# Altium PCB PA_Channel_SUP_CTRL.PcbDoc (part 1 of 2)
Units mm, origin at the board's own origin, x right, y up, seen from the top; angles counter-clockwise.
Board outline 189.6 x 31.35 mm, 2 copper layers (Top Layer, Bottom Layer), stack 1.571 mm thick; 72 components, 44 nets, 242 pads, 317 vias.
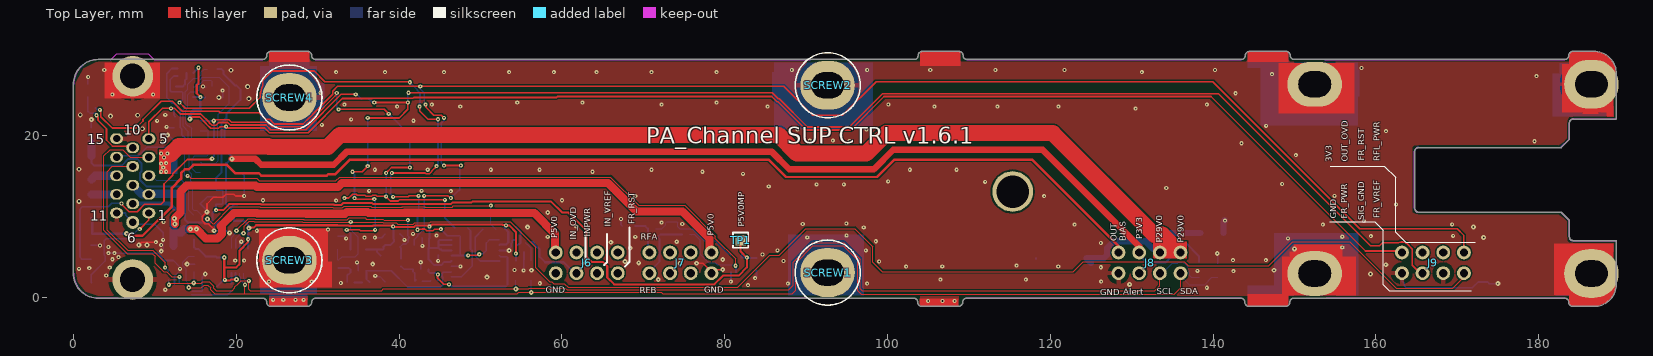
[diagram p0: Top Layer view]
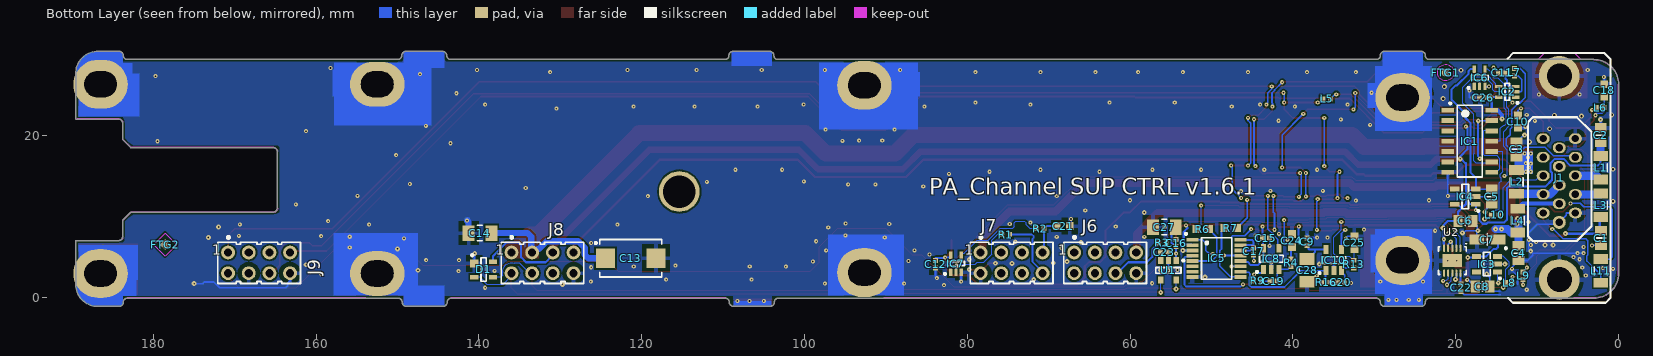
[diagram p1: Bottom Layer view, seen from below]
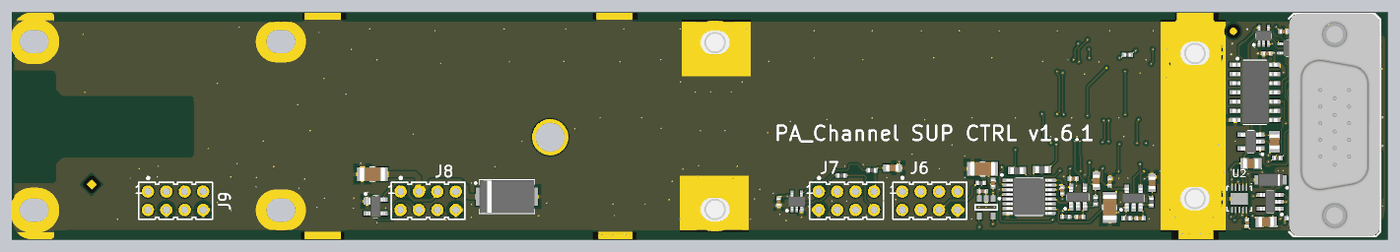
[diagram p3: 3D render of the assembled board from below, using the file's embedded part models]

## Layer stack, top to bottom
Top Solder: solder mask 0.0102, Solder Resist, Dk 4.8
Top Layer: signal copper 0.0356
Dielectric 1: dielectric 1.5, FR-4, Dk 4.8
Bottom Layer: signal copper 0.0356
Bottom Solder: solder mask 0.0102, Solder Resist, Dk 4.8

## Board outline
24.25,-1.05 cw(c24.25,-0.5) 23.7,-0.5 cw(c23.75,-0.5) 23.7,-0.5 ccw(c23.25,-0.5) 23.25,-0.05 cw(c23.25,0) 23.249,-0.05 3,-0.05 cw(c3,3) -0.037,2.716 cw(c0,2.75) -0.05,2.75 -0.05,26.25 cw(c3,26.25) 3,29.3 23.25,29.3 cw(c23.25,29.25) 23.251,29.3 cw(c23.25,29.75) 23.25,29.3 23.251,29.3 ccw(c23.25,29.75) 23.7,29.75 cw(c23.75,29.75) 23.7,29.75 cw(c24.25,29.75) 24.179,30.296 cw(c24.2,30.25) 24.2,30.3 28.7,30.3 cw(c28.7,29.75) 29.25,29.75 cw(c29.2,29.75) 29.25,29.75 ccw(c29.7,29.75) 29.7,29.3 cw(c29.7,29.25) 29.7,29.3 103.3,29.3 ccw(c103.3,29.75) 103.75,29.75 cw(c103.8,29.75) 103.75,29.75 cw(c104.3,29.75) 104.229,30.296 cw(c104.25,30.25) 104.25,30.3 108.75,30.3 cw(c108.75,29.75) 109.3,29.75 cw(c109.25,29.75) 109.3,29.75 cw(c109.75,29.75) 109.3,29.75 ccw(c109.75,29.75) 109.75,29.3 143.5,29.3 ccw(c143.5,29.75) 143.95,29.75 cw(c144,29.75) 143.95,29.75 cw(c144.5,29.75) 144.429,30.296 cw(c144.45,30.25) 144.45,30.3 148.95,30.3 cw(c148.95,29.75) 149.5,29.75 cw(c149.45,29.75) 149.5,29.75 cw(c149.95,29.75) 149.5,29.75 ccw(c149.95,29.75) 149.95,29.3 183.25,29.3 ccw(c183.25,29.75) 183.7,29.75 ccw(c183.25,29.75) 183.7,29.75 cw(c184.25,29.75) 184.25,30.3 186.825,30.3 cw(c186.825,27.575) 189.55,27.575 189.55,22 cw(c189.5,22) 189.5,21.95 184.25,21.95 ccw(c184.25,21.5) 183.8,21.5 cw(c183.75,21.5) 183.8,21.499 183.8,19.5 cw(c183.75,19.5) 183.785,19.464 183.786,19.464 182.786,18.464 182.786,18.465 cw(c182.75,18.5) 182.75,18.45 165.25,18.45 ccw(c165.25,18) 164.8,18 164.8,11 ccw(c165.25,11) 165.25,10.55 182.75,10.55 cw(c182.75,10.5) 182.786,10.535 182.786,10.536 183.786,9.536 183.785,9.536 cw(c183.75,9.5) 183.8,9.5 183.8,7.5 ccw(c184.25,7.5) 184.25,7.05 189.5,7.05 cw(c189.5,7) 189.55,7 cw(c189.5,7) 189.55,6.999 189.55,3 cw(c189.5,3) 189.55,3 ccw(c189.5,3) 189.55,3 189.55,1.64 cw(c189.5,1.64) 189.543,1.614 cw(c186.853,1.64) 186.853,-1.05 184.25,-1.05 cw(c184.25,-0.5) 183.7,-0.5 cw(c183.75,-0.5) 183.7,-0.5 ccw(c183.25,-0.5) 183.25,-0.05 149.9,-0.05 ccw(c149.9,-0.5) 149.45,-0.5 cw(c149.4,-0.5) 149.45,-0.5 cw(c148.9,-0.5) 148.971,-1.046 cw(c148.95,-1) 148.95,-1.05 144.45,-1.05 cw(c144.45,-0.5) 143.9,-0.5 cw(c143.95,-0.5) 143.9,-0.5 cw(c143.45,-0.5) 143.9,-0.5 ccw(c143.45,-0.5) 143.45,-0.05 109.7,-0.05 ccw(c109.7,-0.5) 109.25,-0.5 ccw(c109.7,-0.5) 109.25,-0.5 cw(c108.7,-0.5) 108.771,-1.046 cw(c108.75,-1) 108.75,-1.05 104.25,-1.05 cw(c104.25,-0.5) 103.7,-0.5 cw(c103.75,-0.5) 103.7,-0.5 ccw(c103.25,-0.5) 103.25,-0.05 29.7,-0.05 ccw(c29.7,0) 29.701,-0.05 29.7,-0.05 ccw(c29.7,-0.5) 29.25,-0.5 cw(c29.2,-0.5) 29.25,-0.5 cw(c28.7,-0.5) 28.771,-1.046 cw(c28.75,-1) 28.75,-1.05

## Design rules (kind name [scope] priority, off if disabled: settings)
AcuteAngle [All] p1: minimum=6.00000000000000E+0001 checktracksonly=FALSE
Clearance Clearance_poly [(InPolygon)] p1: gap=0.203 ignorepadtopadclearanceinfootprint=FALSE
Clearance [All] p2: gap=0.152 ignorepadtopadclearanceinfootprint=FALSE except(0: Arc-Hole Track-Hole SMDPad-Hole THPad-Hole Via-Hole Fill-Hole Poly-Hole Region-Hole Text-Hole)
ComponentClearance [All] p1 off: gap=0.254 collisioncheckmode=3 verticalgap=0.254 showdistances=FALSE
DiffPairsRouting [All] p1: maxlimit=0.508 minlimit=0.381 mostfreqgap=0.432 toplayer_minwidth=0.381 toplayer_maxwidth=0.381 toplayer_prefwidth=0.381 bottomlayer_minwidth=0.381 bottomlayer_maxwidth=0.381 bottomlayer_prefwidth=0.381 maxuncoupledlength=12.7
Height [All] p1 off: minheight=0 maxheight=25.4 prefheight=12.7
HoleSize [All] p1: absolutevalues=TRUE maxlimit=5.08 minlimit=0.025 maxpercent=80.000 minpercent=20.000
MinimumSolderMaskSliver [All] p1: minsoldermaskwidth=0
MinimumSolderMaskSliver SilkscreenOverComponentPads [All] p2: minsoldermaskwidth=0
PlaneClearance [All] p1: clearance=0.203
PlaneConnect PlaneConnect_pad [(InPadClass('All Pads'))] p1: planeconnectstyle=Relief reliefexpansion=0.508 reliefentries=4 reliefconductorwidth=0.254 reliefairgap=0.254
PlaneConnect [All] p2: planeconnectstyle=Direct reliefexpansion=0.508 reliefentries=4 reliefconductorwidth=0.254 reliefairgap=0.254
PolygonConnect PolygonConnect_pad [(InPadClass('All Pads'))] p1: connectstyle=Relief reliefconductorwidth=0.508 reliefentries=4 polygonreliefangle="90 Angle" airgapwidth=0.508
PolygonConnect PolygonConnect_pad_1 [HasFootprint('No Footprint')] p2: connectstyle=Relief reliefconductorwidth=0.508 reliefentries=4 polygonreliefangle="90 Angle" airgapwidth=0.508
PolygonConnect [All] p3: connectstyle=Direct reliefconductorwidth=0.254 reliefentries=4 polygonreliefangle="90 Angle" airgapwidth=0.254
RoomDefinition Booster_RF_CH_SUP_CTRL [InComponentClass('Booster_RF_CH_SUP_CTRL')] p1 off: confinementstyle=ConfineIn formatcopy=TRUE lockcomponents=FALSE outline 1.763,26.606 47.534,26.606 47.534,3.603 1.763,3.603
RoutingVias [All] p1: holewidth=0.2 width=0.5 viastyle="Through Hole" minholewidth=0.2 minwidth=0.5 maxholewidth=0.5 maxwidth=1
SilkToSilkClearance [All] p1: silktosilkclearance=0
SilkToSolderMaskClearance [IsPad] p1: minsilkscreentomaskgap=0.025 clearancetoexposedcopper=TRUE
SolderMaskExpansion [All] p1: expansion=0.102 istentingtop=FALSE
ViasUnderSMD ViasUnderSMD_allow [InComponent('IC18') or InComponent('IC10') or InComponent('IC13') or InComponent('IC14') or InComponent('IC15')] p1: allowed=TRUE
ViasUnderSMD [All] p2: allowed=FALSE
Width Width_1 [(InDifferentialPairClass('All Differential Pairs'))] p1: maxlimit=0.203 minlimit=0.203 preferedwidth=0.203
Width [All] p2: maxlimit=6 minlimit=0.152 preferedwidth=0.254
21 further rules are at their usual default settings.

## Components (designator, comment, footprint, x,y, rotation, side; value= is the part's Value field where it differs from the comment)
C1 "1uF" CAPC2012X110N 2.119,7.352 r90 bottom
C2 "1uF" CAPC2012X110N 2.164,20 r270 bottom
C3 "1uF" CAPC2012X110N 12.5,18.25 r270 bottom
C4 "1uF" CAPC2012X110N 12.25,5.5 r90 bottom
C5 "1uF" CAPC2012X140N 15.55,12.45 r90 bottom
C6 "1uF" CAPC2012X140N 18.8,9.45 r0 bottom
C7 "10uF" CAPMP3216X180N 16.089,7.175 r0 bottom
C8 "1uF" CAPC2012X140N 16.686,1.383 r0 bottom
C9 "100nF" CAPC1005X55N 38.25,6.902 r270 bottom
C10 "1nF" CAPC1608X90N 12.323,21.674 r90 bottom
C11 "100nF" CAPC1005X55N 14.285,27.647 r0 bottom
C12 "100nF" CAPC1005X55N 83.881,4.14 r90 bottom
C13 "47uF" CAPMP7343X430N 121.346,4.87 r180 bottom
C14 "10uF" CAPC3216X190N 139.878,7.962 r180 bottom
C15 "100nF" CAPC1005X55N 43.292,7.346 r0 bottom
C16 "100nF" CAPC1005X55N 54.331,6.74 r270 bottom
C17 "100nF" CAPC1005X55N 44.818,5.706 r90 bottom
C18 "1nF" CAPC1608X90N 1.712,25.488 r270 bottom
C19 "100pF" CAPC1005X55N 42.36,2.058 r0 bottom
C20 "100pF" CAPC1005X55N 34.076,1.902 r0 bottom
C21 "560pF" CAPC1608X87N 68.2,8.826 r180 bottom
C22 "100nF" CAPC1005X55N 19.319,1.24 r90 bottom
C23 "100nF" CAPC1005X55N 55.781,5.638 r0 bottom
C24 "560pF" CAPC1608X87N 40.096,7.046 r90 bottom
C25 "560pF" CAPC1608X87N 32.423,6.77 r90 bottom
C26 "100nF" CAPC1005X55N 16.579,24.624 r180 bottom
C27 "10uF" CAPC3216X190N 55.774,8.695 r180 bottom
C28 "10uF" CAPC3216X190N 38.25,3.395 r90 bottom
D1 "PRTR5V0U2X" SOT190P230X110-4N 139.431,3.492 r180 bottom
FTG1 "Use only in PCB" FIDUCIAL_TOP_C100-200 21.213,27.691 r90 bottom
FTG2 "Use only in PCB" FIDUCIAL_TOP_S100-200 178.572,6.559 r90 bottom
IC1 "SN74LVC32AD" SOIC127P600X175-14N 18.25,19.25 r180 bottom
IC2 "74AHC1G04GW" SOT65P212X110-5N 13.642,25.321 r0 bottom
IC3 "24AA02E48T-I/OT" SOT95P280X145-5N 16.139,4.152 r0 bottom
IC4 "NCP703SN33T1G" SOT95P275X110-5N 18.8,12.45 r0 bottom
IC5 "SN74LVC112APWR" SOP65P640X120-16N 49.363,4.852 r180 bottom
IC6 "74AHC1G04GW" SOT65P212X110-5N 17.041,27.063 r90 bottom
IC7 "74AHC1G04GW" SOT65P212X110-5N 81.392,4.203 r90 bottom
IC8 "ADCMP600BRJZ-R2" SOT95P280X145-5N 42.64,4.802 r90 bottom
IC10 "ADCMP600BRJZ-R2" SOT95P280X145-5N 34.954,4.652 r90 bottom
J1 "HD-Sub" TYCO_5750489-1 7.25,14.75 r90 bottom locked
J6 "Header 8" ZL2019-8_MIRR 63.05,4.304 r180 top locked
J7 "Header 8" ZL2019-8_MIRR 74.55,4.304 r180 top locked
J8 "Header 8" ZL2019-8_MIRR 132.2,4.304 r180 top locked
J9 "Header 8" ZL2019-8_MIRR 167.02,4.304 r180 top locked
L1 "600R@100MHz" INDC3216X130N 2.164,16 r270 bottom
L2 "600R@100MHz" INDC3216X130N 12.5,14.25 r90 bottom
L3 "600R@100MHz" INDC3216X130N 2.144,11.391 r90 bottom
L4 "600R@100MHz" INDC3216X130N 12.364,9.5 r270 bottom
L5 "220R@100MHz" INDC1005X55N 35.827,24.447 r0 bottom
L6 "220R@100MHz" INDC1005X55N 2.195,23.38 r0 bottom
L7 "220R@100MHz" INDC1005X55N 12.761,27.723 r90 bottom
L8 "220R@100MHz" INDC1005X55N 13.422,1.891 r0 bottom
L9 "220R@100MHz" INDC1005X55N 11.694,2.73 r270 bottom
L10 "220R@100MHz" INDC1005X55N 15.149,10.197 r0 bottom
L11 "600R@100MHz" INDC3216X130N 2.169,3.314 r90 bottom
R1 "1k" RESC1005X40N 75.25,7.784 r180 bottom
R2 "1k" RESC1005X40N 71.029,8.5 r0 bottom
R3 "1k" RESC1005X40N 56.03,6.75 r0 bottom
R4 "0" RESC1005X40N 40.21,4.322 r90 bottom
R6 "0" RESC1608X55N 51.063,8.45 r0 bottom
R7 "0" RESC1608X55N 47.613,8.586 r180 bottom
R9 "1k" RESC1005X40N 44.318,2.103 r0 bottom
R13 "0" RESC1005X40N 32.504,4.152 r90 bottom
R16 "1k" RESC1005X40N 35.904,1.902 r0 bottom
SCREW1 "M3x6" BOSSARD_BN5687-3061605_v 92.644,3.111 r0 top
SCREW2 "M3x6" BOSSARD_BN5687-3061605_v 92.644,26.123 r0 top
SCREW3 "M3x6" BOSSARD_BN5687-3061605_v 26.503,4.609 r0 top
SCREW4 "M3x6" BOSSARD_BN5687-3061605_v 26.503,24.624 r0 top
TP1 "Test Point" TPS127 81.951,7.098 r0 top
U1 "MCP3221A5T-I/OT" SOT-23-OT5_L 55.281,3.39 r270 bottom
U2 "AD5627RBCPZ-REEL7" CP-10-9_M 20.398,4.571 r270 bottom locked

## Footprints (in the part's own frame and the unit in brackets; to place one, negate y for a bottom-side part, rotate by r counter-clockwise, add the part's x,y. Pads: shape width x height; smd on the part's side, far side on the other; paste and mask are expansions set on the pad)
BOSSARD_BN5687-3061605_v [mm] "M3 L=6mm Hexalobular Socket Pan Head Screw, Fully Threaded - Stainless Steel A2"
  silkscreen extent -4,-4 4,4, body extent -2.8,-2.8 2.8,2.8, height 2.4
CAPC1005X55N [mm] "Capacitor, Non-Polarized, Chip; 1.00mm L X 0.50mm W X 0.70mm H, IPC Medium Density"
  rect 0.62x0.62 smd: 1(-0.45,0) 2(0.45,0)
  body extent -0.52,-0.27 0.53,0.28, height 0.55
CAPC1608X87N [mm] "Chip Capacitor, Body 1.6x0.8mm IPC Medium Density"
  rect 0.95x1 smd: 1(-0.8,0) 2(0.8,0)
  body extent -0.87,-0.47 0.88,0.48, height 0.87
CAPC1608X90N [mm] "Chip Capacitor, Body 1.6x0.8mm IPC Medium Density"
  rect 0.95x0.95 smd: 1(-0.75,0) 2(0.75,0)
  body extent -0.85,-0.45 0.85,0.45, height 0.9
CAPC2012X110N [mm] "Chip Capacitor, Body 2.0x1.25mm, IPC Medium Density"
  rect 1.15x1.45 smd: 1(-0.9,0) 2(0.9,0)
  silkscreen extent 0,-0.58 0,0.58, body extent -1.05,-0.67 1.05,0.68, height 1.1
CAPC2012X140N [mm] "Chip Capacitor, Body 2.0x1.25mm, IPC Medium Density"
  rect 1.15x1.45 smd: 1(-0.9,0) 2(0.9,0)
  silkscreen extent 0,-0.58 0,0.58, body extent -1.05,-0.67 1.05,0.68, height 1.3
CAPC3216X190N [mm] "Chip Capacitor, Body 3.2x1.6mm, IPC Medium Density"
  rect 1.45x1.9 smd: 1(-1.4,0) 2(1.4,0)
  silkscreen extent -0.3,-0.95 0.3,0.95, body extent -1.75,-0.95 1.75,0.95, height 1.9
CAPMP3216X180N [mm] "Capacitor, Polarized, Molded  Body 3.2x1.6mm, IPC Medium Density"
  rect 1.8x1.25 smd: 1(-1.3,0) 2(1.3,0)
  silkscreen extent -2.4,-0.7 0,1.2, body extent -1.7,-0.9 1.7,0.9, height 1.6
CAPMP7343X430N [mm] "Capacitor, Polarized, Molded  Body 7.3x4.3mm, IPC Medium Density"
  rect 2.35x2.45 smd: 1(-3.1,0) 2(3.1,0)
  silkscreen extent -4.43,-2.3 3.8,2.3, body extent -3.8,-2.3 3.8,2.3, height 4.3
CP-10-9_M [mm] "SON, 10-Leads, Body 3x3mm, Pitch 0.5mm, Thermal Pad 2.35x1.6mm, IPC Low Density"
  oval 0.9x0.25 smd: 1(-1.525,1) 2(-1.525,0.5) 3(-1.525,0) 4(-1.525,-0.5) 5(-1.525,-1) 6(1.525,-1) 7(1.525,-0.5) 8(1.525,0) 9(1.525,0.5) 10(1.525,1)
  rect 1.6x2.35 smd: 11(0,0)
  silkscreen extent -2.15,-1.7 1.7,1.75, body extent -1.55,-1.55 1.55,1.55, height 0.8
FIDUCIAL_TOP_C100-200 [mm] "Round Fiducial Target, Top Layer, 1.0mm, Top Solder 2.0mm, Keepout =2.0mm"
  round 1 smd paste-0.51 mask+0.5: FTG2(0,0)
  Top Layer keep-out circle w0.1: c0,0 r1
FIDUCIAL_TOP_S100-200 [mm] "Square Fiducial Target, Top Layer, 1.0mm, Top Solder 2.0mm, Keepout =2.0mm"
  rect 1x1 smd rot 45 paste-0.51 mask+0.5: 1(0,0)
  Top Layer keep-out region: 1.414,0 0,-1.414 -1.414,0 0,1.414
INDC1005X55N [mm] "Chip Inductor, 2-Leads, EIA 0402, Metric 1005, Body 1x0.5mm, 0402IPC Medium Density"
  rect 0.6x0.62 smd: 1(-0.46,0) 2(0.46,0)
  body extent -0.52,-0.27 0.53,0.28, height 0.55
INDC3216X130N [mm] "Chip Inductor, EIA 1206, Metric 3216, 3.20mm L X 1.60mm W, IPC Medium Density"
  rect 1.2x1.8 smd: 1(-1.45,0) 2(1.45,0)
  silkscreen extent -0.5,-0.8 0.5,0.8, body extent -1.7,-0.9 1.7,0.9, height 1.3
RESC1005X40N [mm] "Chip Resistor, EIA 0402, Metric 1005, Body 1.0x0.5mm, IPC Medium Density"
  rect 0.58x0.62 smd: 1(-0.47,0) 2(0.47,0)
  body extent -0.52,-0.27 0.53,0.28, height 0.4
RESC1608X55N [mm] "Chip Resistor, EIA 0603, Metric 1608, Body 1.6x0.8mm, IPC Medium Density"
  rect 0.9x1 smd: 1(-0.8,0) 2(0.8,0)
  body extent -0.87,-0.47 0.88,0.48, height 0.55
SOIC127P600X175-14N [mm] "SOIC 14, Pitch 1.27mm - Body 4x8.75mm, IPC Medium Density"
  rect 1.55x0.6 smd: 1(-2.7,3.81) 2(-2.7,2.54) 3(-2.7,1.27) 4(-2.7,0) 5(-2.7,-1.27) 6(-2.7,-2.54) 7(-2.7,-3.81) 8(2.7,-3.81) 9(2.7,-2.54) 10(2.7,-1.27) 11(2.7,0) 12(2.7,1.27) 13(2.7,2.54) 14(2.7,3.81)
  silkscreen extent -2.53,-4.4 1.55,4.78, body extent -3.1,-4.37 3.1,4.38, height 1.75
SOP65P640X120-16N [mm] "SOP, 0.65mm pitch; 16 pin, 4.40mm W X 5.00mm L X 1.20mm H body IPC Medium Density"
  rect 1.45x0.45 smd: 1(-2.95,2.275) 2(-2.95,1.625) 3(-2.95,0.975) 4(-2.95,0.325) 5(-2.95,-0.325) 6(-2.95,-0.975) 7(-2.95,-1.625) 8(-2.95,-2.275) 9(2.95,-2.275) 10(2.95,-1.625) 11(2.95,-0.975) 12(2.95,-0.325) 13(2.95,0.325) 14(2.95,0.975) 15(2.95,1.625) 16(2.95,2.275)
  silkscreen extent -3.88,-2.55 1.85,3.15, body extent -3.12,-2.55 3.12,2.55, height 1.2
SOT65P212X110-5N [mm] "SOT353, SOT, 0.65mm Pitch, 5 pin, 1.25mm W X 2.05mm L X 1.10mm H, IPC Medium Density"
  rect 0.9x0.4 smd: 1(-1.05,0.65) 2(-1.05,0) 3(-1.05,-0.65) 4(1.05,-0.65) 5(1.05,0.65)
  silkscreen extent -1.37,-1.05 0.28,1.47, body extent -1.2,-1.1 1.2,1.1, height 1.1
SOT95P275X110-5N [mm] "SOT, 0.95mm Pitch; 5 Pin, 1.50mm W X 3.00mm L X 1.10mm H Body, IPC Medium Density"
  rect 1.15x0.6 smd: 1(-1.3,0.95) 2(-1.3,0) 3(-1.3,-0.95) 4(1.3,-0.95) 5(1.3,0.95)
  silkscreen extent -1.72,-1.5 0.4,1.87, body extent -1.37,-1.5 1.37,1.5, height 1.1
SOT95P280X145-5N [mm] "SOT, 0.95mm pitch; 5 pin, 1.60mm W X 2.90mm L X 1.45mm H body, IPC Medium Density"
  rect 1.1x0.6 smd: 1(-1.3,0.95) 2(-1.3,0) 3(-1.3,-0.95) 4(1.3,-0.95) 5(1.3,0.95)
  silkscreen extent -1.72,-1.45 0.43,1.87, body extent -1.4,-1.5 1.4,1.5, height 1.45
SOT190P230X110-4N [mm] "SOT143, SOT, 1.90mm Pitch; 4 Pin, 1.30mm W X 2.90mm L X 1.10mm H body, IPC Medium Density"
  rect 1x1 smd: 1(-1.15,0.75)
  rect 1x0.6 smd: 2(-1.15,-0.95) 3(1.15,-0.95) 4(1.15,0.95)
  silkscreen extent -1.53,-1.45 0.33,1.87, body extent -1.25,-1.5 1.25,1.5, height 1.1
SOT-23-OT5_L [mm] "SOT23, 5-Leads, Body 2.9x1.7mm, Pitch 0.95mm, Lead Span 2.8mm, IPC High Density"
  rect 0.9x0.65 smd: 1(-1.2,0.95) 2(-1.2,0) 3(-1.2,-0.95) 4(1.2,-0.95) 5(1.2,0.95)
  silkscreen extent -1.32,-1.55 0.35,1.95, body extent -0.9,-1.55 0.9,1.55, height 1.45
TPS127 [mm] "1.27 x  1.27mm SMD Test Point Area"
  rect 1.27x1.27 smd paste-1.27: 1(0,0)
  silkscreen extent -0.94,-0.94 0.94,0.94
TYCO_5750489-1 [mm]
  oval 1.3x1.6 hole 0.9: 1(-4.318,1.98) 2(-2.032,1.98) 3(0.254,1.98) 4(2.54,1.98) 5(4.826,1.98) 7(-3.175,0) 8(-0.889,0) 9(1.397,0) 10(3.683,0) 11(-4.318,-1.98) 12(-2.032,-1.98) 13(0.254,-1.98) 14(2.54,-1.98) 15(4.826,-1.98)
  round 1.6 hole 0.9: 6(-5.461,0)
  round 5 hole 3.07: 16(12.497,0) 17(-12.497,0)
  silkscreen extent -15.35,-6.3 15.35,6.34, body extent -15.4,-6.25 15.4,6.25, height 12.11
ZL2019-8_MIRR [mm]
  round 1.7 hole 1: 1(-3.81,-1.27) 2(-3.81,1.27) 3(-1.27,-1.27) 4(-1.27,1.27) 5(1.27,-1.27) 6(1.27,1.27) 7(3.81,-1.27) 8(3.81,1.27)
  body extent -5.08,-2.5 5.08,2.54, height 16.4

## Part data
C1 C2 C3 C4: library part CC0805_1UF_50V_10%_X7R, "Non-polarised capacitor", Case=0805, Manufacturer=GENERIC, Manufacturer1 ComponentHeight=1.1mm, Manufacturer1 Example=KEMET, Manufacturer1 Part Number=C0805C105K5RACTU, Tolerance=±10%, Voltage=50V, Author="CERN DEM JLC", Component Type=Standard, CreateDate=04.12.2013, HelpURL=\\cern.ch\dfs\Applications\Altium\Datasheets\CC0805_X7R_KEMET.pdf, LatestRevisionDate=04.12.2013, Manufacturer Part Number=CC0805_1UF_50V_10%_X7R, Mounted=Yes, Part Description="SMD Multilayer Chip Ceramic Capacitor", Part Number=CC0805_1UF_50V_10%_X7R, Pin Count=2, Sense=No, SMD=Yes, Socket=No, Status=Preferred, TC=X7R
C5 C6 C8: library part CC0805_1UF_35V_20%_X7R, "Non-polarised capacitor", Case=0805, Manufacturer=GENERIC, Manufacturer1 ComponentHeight=1.35mm, Manufacturer1 Example="TAIYO YUDEN", Manufacturer1 Part Number=GMK212B7105MG-T, Tolerance=±20%, Voltage=35V, Author="CERN DEM JLC", Component Type=Standard, CreateDate=22.06.2011, HelpURL=\\cern.ch\dfs\Applications\Altium\Datasheets\CC0805_X7R_TAIYO-YUDEN_HIGH-VALUE.pdf, LatestRevisionDate=22.06.2011, Manufacturer Part Number=CC0805_1UF_35V_20%_X7R, Mounted=Yes, Part Description="SMD Multilayer Chip Ceramic Capacitor", Part Number=CC0805_1UF_35V_20%_X7R, Pin Count=2, Sense=No, SMD=Yes, Socket=No, Status="Not Recommended", TC=X7R
C7: library part CTE3216-18_10UF_16V_20%_AVX_TCJ, "Polarised capacitor", Case=A, Manufacturer=AVX, Manufacturer Part Number=TCJA106M016R0200, Tolerance=±20%, Voltage=16V, Author="CERN DEM JLC", ComponentHeight=1.8mm, Component Type=Standard, CreateDate=29.03.2012, HelpURL=\\cern.ch\dfs\Applications\Altium\Datasheets\CTE_AVX_TCJ.pdf, LatestRevisionDate=29.03.2012, Mounted=Yes, Part Description="ESR 0R200 Tantalum Solid Electrolytic Chip Capacitor with Conductive Polymer Electrode", Part Number=CTE3216-18_10UF_16V_20%_AVX_TCJ, Pin Count=2, Sense=No, SMD=Yes, Socket=No, Status=Preferred
C9 C11 C12 C15 C16 C17 C22 C23 C26: library part CC0402_100NF_16V_10%_X5R, "Non-polarised capacitor", Case=0402, Manufacturer=GENERIC, Manufacturer1 ComponentHeight=0.55mm, Manufacturer1 Example=MURATA, Manufacturer1 Part Number=GRM155R61C104KA88D, Tolerance=±10%, Voltage=16V, Author="CERN DEM JLC", Component Type=Standard, CreateDate=10.12.2013, HelpURL=\\cern.ch\dfs\Applications\Altium\Datasheets\CC0402_X5R_MURATA_GRM.pdf, LatestRevisionDate=10.12.2013, Manufacturer Part Number=CC0402_100NF_16V_10%_X5R, Mounted=Yes, Part Description="SMD Multilayer Chip Ceramic Capacitor", Part Number=CC0402_100NF_16V_10%_X5R, Pin Count=2, Sense=No, SMD=Yes, Socket=No, Status=None, TC=X5R
C10 C18: library part CC0603_1NF_50V_1%_NP0, "Non-polarised capacitor", Case=0603, Manufacturer=GENERIC, Manufacturer1 ComponentHeight=0.9mm, Manufacturer1 Example=AVX, Manufacturer1 Part Number=06035A102FAT2A, Manufacturer Part Number=CC0603_1NF_50V_5%_NP0, Tolerance=±5%, Voltage=50V, Author="CERN DEM JLC", Component Type=Standard, CreateDate=15/06/2017, HelpURL=\\cern.ch\dfs\Applications\Altium\Datasheets\CC0603_C0G_AVX.pdf, LatestRevisionDate=15/06/2017, Mounted=Yes, Part Description="SMD Multilayer Chip Ceramic Capacitor", Part Number=CC0603_1NF_50V_5%_NP0, Pin Count=2, Sense=No, SMD=Yes, Socket=No, Status=None, TC=C0G/NP0
C13: library part CTE7343-43_47UF_35V_10%_LESR0300, "Polarised capacitor", Case=E, Manufacturer=GENERIC, Manufacturer1 ComponentHeight=4.3mm, Manufacturer1 Example=AVX, Manufacturer1 Part Number=T495X476K035ATE300, Tolerance=±10%, Voltage=35V, Author="CERN DEM JLC", Component Type=Standard, CreateDate=27.05.2013, HelpURL=\\cern.ch\dfs\Applications\Altium\Datasheets\CTEB_KEMET_T495.pdf, LatestRevisionDate=27.05.2013, Manufacturer Part Number=CTE7343-43_47UF_35V_10%_LESR0300, Mounted=Yes, Part Description="ESR 0R3 Solid Tantalum Chip Capacitor", Part Number=CTE7343-43_47UF_35V_10%_LESR0300, Pin Count=2, Sense=No, SMD=Yes, Socket=No, Status=Preferred
C14 C27 C28: library part CC1206_10UF_50V_10%_X5R_TDK_CGA5L3X5R1H106K160AB, "Non-polarised capacitor", Case=1206, Manufacturer=TDK, Manufacturer Part Number=CGA5L3X5R1H106K160AB, Tolerance=±10%, Voltage=50V, Author="CERN DEM BC", ComponentHeight=1.9mm, Component Type=Standard, CreateDate=29.02.2016, HelpURL=\\cern.ch\dfs\Applications\Altium\Datasheets\CC1206_X5R_TDK_CGA.pdf, LatestRevisionDate=13.09.2016, Mounted=Yes, Part Description="SMD Multilayer Chip Ceramic Capacitor (Automotive Grade)", Part Number=CC1206_10UF_50V_10%_X5R_TDK_CGA5L3X5R1H106K160AB, Pin Count=2, Sense=No, SMD=Yes, Socket=No, Status="Not Recommended", TC=X5R
C19 C20: library part CC0402_100PF_50V_5%_C0G, "Non-polarised capacitor", Case=0402, Manufacturer=GENERIC, Manufacturer1 ComponentHeight=0.55mm, Manufacturer1 Example=KEMET, Manufacturer1 Part Number=C0402C101J5GACTU, Tolerance=±5%, Voltage=50V, Author="CERN DEM JLC", Component Type=Standard, CreateDate=03.12.2007, HelpURL="\\cern.ch\dfs\Applications\Altium\Datasheets\CC0805_C0G_KEMET_(Commercial Grade).pdf", LatestRevisionDate=22.04.2015, Manufacturer Part Number=CC0402_100PF_50V_5%_C0G, Mounted=Yes, Part Description="SMD Multilayer Chip Ceramic Capacitor", Part Number=CC0402_100PF_50V_5%_C0G, Pin Count=2, Sense=No, SMD=Yes, Socket=No, Status=Preferred, TC=C0G/NP0
C21 C24 C25: library part CC0603_560PF_50V_5%_NP0, "Non-polarised capacitor", Case=0603, Manufacturer=GENERIC, Manufacturer1 ComponentHeight=0.87mm, Manufacturer1 Example=PHYCOMP, Manufacturer1 Part Number=223886715561, Tolerance=±5%, Voltage=50V, Author="CERN DEM JLC", Component Type=Standard, CreateDate=03.12.2007, HelpURL=\\cern.ch\dfs\Applications\Altium\Datasheets\CC0603_NP0_PHYCOMP.pdf, LatestRevisionDate=03.12.2007, Manufacturer Part Number=CC0603_560PF_50V_5%_NP0, Mounted=Yes, Part Description="SMD Multilayer Chip Ceramic Capacitor", Part Number=CC0603_560PF_50V_5%_NP0, Pin Count=2, Sense=No, SMD=Yes, Socket=No, Status=Preferred, TC=C0G/NP0
D1: "Ultra Low Capacitance Double Rail-to-Rail ESD Protection Diode", Case=SOT143B, Manufacturer="NXP SEMICONDUCTORS", Voltage=5.5V, Author="CERN DEM JLC", Bonding=No, ComponentHeight=1.1mm, Component Type=Standard, CreateDate=22.03.2011, Device=PRTR5V0U2X, HelpURL=\\cern.ch\dfs\Applications\Altium\Datasheets\PRTR5V0U2X.pdf, LatestRevisionDate=22.03.2011, Manufacturer Part Number=PRTR5V0U2X, Mounted=Yes, PackageDescription="SOT143B, SOT, 1.90mm Pitch; 4 Pin, 1.30mm W X 2.90mm L X 1.10mm H body, IPC Medium Density", Part Description="Ultra Low Capacitance (1pF) Double Rail-to-Rail ESD Protection Diode (8kV)", Part Number=PRTR5V0U2X, Pin Count=4, PressFit=No, Sense=No, SMD=Yes, Socket=No
FTG1: library part FIDUCIAL_TARGET_C100-200, "Fiducial Target", Author="CERN DEM JLC", Component Type="Standard (No BOM)", ComponentHeight=0mm, CreateDate=09.02.2010, Family=Fiducial, HelpURL=Undefined, LatestRevisionDate=04.04.2012, Mounted=No, PackageDescription="Round Fiducial Target, Top Layer, 1.0mm, Top Solder 2.0mm, Keepout =2.0mm", Part Description="Round Fiducial Target, Top Layer, 1.0mm, Top Solder 2.0mm, Keepout =2.0mm", Part Number=FIDUCIAL_TARGET_C100-200, Pin Count=1, Sense=No, SMD=Yes, Socket=No, Status=None
FTG2: library part FIDUCIAL_TARGET_S100-200, "Fiducial Target", Author="CERN DEM JLC", Component Type="Standard (No BOM)", ComponentHeight=0mm, CreateDate=09.02.2010, Family=Fiducial, HelpURL=Undefined, LatestRevisionDate=04.04.2012, Mounted=No, PackageDescription="Square Fiducial Target, Top Layer, 1.0mm, Top Solder 2.0mm, Keepout =2.0mm", Part Description="Square Fiducial Target, Top Layer, 1.0mm, Top Solder 2.0mm, Keepout =2.0mm", Part Number=FIDUCIAL_TARGET_S100-200, Pin Count=1, Sense=No, SMD=Yes, Socket=No, Status=None
IC1: "Quad 2-Input OR Gate", Case=SOIC14, Manufacturer="TEXAS INSTRUMENTS", Author="CERN DEM JLC", Bonding=No, ComponentHeight=1.75mm, Component Type=Standard, CreateDate=21.03.2012, Device=SN74LVC32AD, HelpURL=\\cern.ch\dfs\Applications\Altium\Datasheets\SN74LVC32AD.pdf, LatestRevisionDate=21.03.2012, Manufacturer Part Number=SN74LVC32AD, Mounted=Yes, PackageDescription="SOIC 14, Pitch 1.27mm - Body 4x8.75mm, IPC Medium Density", Part Description="Quad 2-Input Positive-OR Gate", Part Number=SN74LVC32AD, Pin Count=14, PressFit=No, Sense=No, SMD=Yes, Socket=No
IC2 IC6 IC7: "Single Inverter Buffer", Case=SOT353, Manufacturer="NXP SEMICONDUCTORS", Author="CERN DEM JLC", Bonding=No, ComponentHeight=1.1mm, Component Type=Standard, CreateDate=03.03.2010, Device=74AHC1G04GW, HelpURL=\\cern.ch\dfs\Applications\Altium\Datasheets\74AHC1G04GW.pdf, LatestRevisionDate=03.03.2010, Manufacturer Part Number=74AHC1G04GW, Mounted=Yes, PackageDescription="SOT353, SOT, 0.65mm Pitch, 5 pin, 1.25mm W X 2.05mm L X 1.10mm H, IPC Medium Density", Part Description="Single Inverter Buffer", Part Number=74AHC1G04GW, Pin Count=3, PressFit=No, Sense=No, SMD=Yes, Socket=No
IC3: "1.7V-5.5V, 2K I2C Serial EEPROM With EUI-48 Node Identity", Case=SOT23-5, Manufacturer="MICROCHIP TECHNOLOGY", Author="CERN DEM MR", Bonding=No, ComponentHeight=1.45mm, Component Type=Standard, CreateDate=2016-03-31, Device=24AA02E48T-I/OT, HelpURL=\\cern.ch\dfs\Applications\Altium\Datasheets\24AA02E48T-I-OT.pdf, LatestRevisionDate=2016-03-31, Manufacturer Part Number=24AA02E48T-I/OT, Mounted=Yes, PackageDescription="SOT, 0.95mm pitch; 5 pin, 1.60mm W X 2.90mm L X 1.45mm H body, IPC Medium Density", Part Description="1.7V-5.5V, 2K I2C Serial EEPROM With EUI-48 Node Identity", Part Number=24AA02E48T-I/OT, Pin Count=5, PressFit=No, Sense=No, SMD=Yes, Socket=No
IC4: "3.3V 300mA, Ultra-Low Quiescent Current, IQ 12uA, Ultra-Low Noise, LDO Voltage Regulator", Case=SOT23-5, Manufacturer="ON SEMICONDUCTOR", Author="CERN DEM JLC", Bonding=No, ComponentHeight=1.1mm, Component Type=Standard, CreateDate=16.02.2017, Device=NCP703SN33T1G, HelpURL=\\cern.ch\dfs\Applications\Altium\Datasheets\NCP703SN33T1G.pdf, LatestRevisionDate=16.02.2017, Manufacturer Part Number=NCP703SN33T1G, Mounted=Yes, PackageDescription="SOT, 0.95mm Pitch; 5 Pin, 1.50mm W X 3.00mm L X 1.10mm H Body, IPC Medium Density", Part Description="3.3V 300mA, Ultra-Low Quiescent Current, IQ 12uA, Ultra-Low Noise, LDO Voltage Regulator", Part Number=NCP703SN33T1G, Pin Count=5, PressFit=No, Sense=No, SMD=Yes, Socket=No
IC5: library part 74LVC112APWR, "Dual Negative-Edge-Triggered J-K Flip-Flop With Clear And Preset", Case=TSSOP16, Manufacturer="TEXAS INSTRUMENTS", Author="CERN DEM JLC", Bonding=No, Component Type=Standard, ComponentHeight=1.75mm, CreateDate=06.08.2012, Device=SN74LVC112APWR, HelpURL=\\cern.ch\dfs\Applications\Altium\Datasheets\SN74LS112AD.pdf, LatestRevisionDate=06.08.2012, Manufacturer Part Number=SN74LVC112APWR, Mounted=Yes, PackageDescription="SOP, 0.65mm Pitch; 16 Pin, 4.40mm W X 5.00mm L X 1.20mm H Body, IPC Medium Density", Part Description="Dual Negative-Edge-Triggered J-K Flip-Flops With Clear and Preset", Part Number=SN74LVC112APWR, Pin Count=16, PressFit=No, Sense=No, SMD=Yes, Socket=No
IC8 IC10: "Rail-to-Rail, Very Fast, 2.5 V to 5.5 V Single-Supply TTL/CMOS Comparator", Case=SOT23-5, Manufacturer="ANALOG DEVICES", Author="CERN DEM JLC", Bonding=No, ComponentHeight=1.45mm, Component Type=Standard, CreateDate=25/04/2012, Device=ADCMP600BRJZ-R2, HelpURL=\\cern.ch\dfs\Applications\Altium\Datasheets\ADCMP600BRJZ-R2.pdf, LatestRevisionDate=25/04/2012, Manufacturer Part Number=ADCMP600BRJZ-R2, Mounted=Yes, PackageDescription="SOT, 0.95mm pitch; 5 pin, 1.60mm W X 2.90mm L X 1.45mm H body, IPC Medium Density", Part Description="Rail-to-Rail, Very Fast, 2.5 V to 5.5 V Single-Supply TTL/CMOS Comparator", Part Number=ADCMP600BRJZ-R2, Pin Count=5, PressFit=No, Sense=No, SMD=Yes, Socket=No
J1: library part CON_DB15_V_M_5750489-1, "Connector High Density D-sub 15 Male", Manufacturer="HARTING Elektronik", Manufacturer Part Number=09561617712, Part Number=HARTING_09561617712, Author=GK, ComponentHeight=12.75mm, Component Type=Standard, CreateDate=26.06.2013, Family=HD-Sub, HelpURL=\\cern.ch\dfs\Applications\Altium\Datasheets\TYCO_1-1734530-1.pdf, LatestRevisionDate=26.06.2013, Mounted=Yes, Part Description="15 Male Contacts, Straight High Density D-SUB Connector, AMPLIMITE HD-22 Serie", Pin Count=17, PressFit=No, Sense=No, SMD=No, Socket=No, Status=None
J6 J7 J8 J9: library part "CON_2x4 2.54 male MIRROR", "Connector 8 Male", Manufacturer=NINIGI, Manufacturer Part Number=ZL2019-8, Author=GK, ComponentHeight=19.4, Component Type=Standard, CreateDate=08.03.2017, Family="Header 8", HelpURL=\\cern.ch\dfs\Applications\Altium\Datasheets\SAMTEC_TSW-104-23-L-D.pdf, LatestRevisionDate=08.03.2017, Mounted=Yes, Part Description="8 Contacts, Pitch 2.54mm, Dual Row  Through Mount Straight Header (Post Lead 5.84mm, Tail Lead 2.92mm, Insulator 2.54mm)", Part Number=ZL2019-8, Pin Count=8, PressFit=No, Sense=No, SMD=No, Socket=No, Status=None
L1 L2 L3 L4 L11: library part IND1206_WURTH_74279218, "Inductor", Case=1206, Manufacturer="WURTH ELEKTRONIK", Manufacturer Part Number=74279218, Power=2A, Resistance=0.1R, Tolerance=±25%, Author="CERN DEM JLC", ComponentHeight=1.3mm, Component Type=Standard, CreateDate=24.01.2012, HelpURL=\\cern.ch\dfs\Applications\Altium\Datasheets\IND1206_WURTH_74279218.pdf, LatestRevisionDate=24.01.2012, Mounted=Yes, Part Description="SMD EMI Suppression Chip Ferrite Bead (WE-CBF Series)", Part Number=IND1206_WURTH_74279218, Pin Count=2, Sense=No, SMD=Yes, Socket=No, Status=None
L5 L6 L7 L8 L9 L10: library part IND0402_MURATA_BLM15HB221SN1, "Inductor", Case=0402, Manufacturer=MURATA, Manufacturer Part Number=BLM15HB221SN1, Power=250mA, Resistance=1R, Tolerance=±25%, Author="CERN DEM JLC", ComponentHeight=0.55mm, Component Type=Standard, CreateDate=23.06.2009, HelpURL=\\cern.ch\dfs\Applications\Altium\Datasheets\IND0402_MURATA_BLM15H.pdf, LatestRevisionDate=23.06.2009, Mounted=Yes, Part Description="SMD EMIFIL Suppression Chip Ferrite Bead", Part Number=IND0402_MURATA_BLM15HB221SN1, Pin Count=2, Sense=No, SMD=Yes, Socket=No, Status=None
R1 R2 R3 R9 R16: library part R0402_1K_1%_0.0625W_100PPM, "Resistor - 1%", Case=0402, Manufacturer=GENERIC, Manufacturer1 ComponentHeight=0.4mm, Manufacturer1 Example="YAGEO PHYCOMP", Manufacturer1 Part Number=232270671002L, Power=0.0625W, Tolerance=±1%, Author="CERN DEM JLC", Component Type=Standard, HelpURL=\\cern.ch\dfs\Applications\Altium\Datasheets\R0402_Phycomp_RC0402.pdf, Manufacturer Part Number=R0402_1K_1%_0.0625W_100PPM, Mounted=Yes, Part Description="General Purpose Thick Film Chip Resistor", Part Number=R0402_1K_1%_0.0625W_100PPM, Pin Count=2, PressFit=No, Sense=No, SMD=Yes, Socket=No, Status="Not Recommended", TC=±100ppm/°C
  R1 R2 R3: CreateDate=03/12/2007, LatestRevisionDate=17/10/2012
  R9 R16: CreateDate=03.12.2007, LatestRevisionDate=17.10.2012
R4 R13: library part R0402_0R_JUMPER, "Resistor", Case=0402, Manufacturer=GENERIC, Manufacturer1 ComponentHeight=0.4mm, Manufacturer1 Example="YAGEO PHYCOMP", Manufacturer1 Part Number=232270591001L, Author="CERN DEM JLC", Component Type=Standard, CreateDate=03.12.2007, HelpURL=\\cern.ch\dfs\Applications\Altium\Datasheets\R0402_Phycomp_RC0402.pdf, LatestRevisionDate=17.10.2012, Manufacturer Part Number=R0402_0R_JUMPER, Mounted=Yes, Part Description="1A (0.05R Max DC Resistance) Zero Ohm Jumper", Part Number=R0402_0R_JUMPER, Pin Count=2, Sense=No, SMD=Yes, Socket=No, Status="Not recommended"
R6 R7: library part R0603_0R_JUMPER, "Resistor", Case=0603, Manufacturer=GENERIC, Manufacturer1 ComponentHeight=0.55mm, Manufacturer1 Example="NIC COMPONENT", Manufacturer1 Part Number=NRC06Z0, Author="CERN DEM JLC", Component Type=Standard, CreateDate=03/12/2007, HelpURL=\\cern.ch\dfs\Applications\Altium\Datasheets\R0603_NIC_NRC.pdf, LatestRevisionDate=13/03/2008, Manufacturer Part Number=R0603_0R_JUMPER, Mounted=Yes, Part Description="1A (0.05R Max DC Resistance) Zero Ohm Jumper", Part Number=R0603_0R_JUMPER, Pin Count=2, PressFit=No, Sense=No, SMD=Yes, Socket=No, Status=Preferred
SCREW1 SCREW2 SCREW3 SCREW4: library part BOSSARD_BN5687-3061605_v, "Screw", Manufacturer=BOSSARD, Manufacturer Part Number="BN5687 Art.3061605", Author="CERN DEM JLC", Component Type=Mechanical, ComponentHeight=2.4mm, CreateDate=15/01/2013, HelpURL=\\cern.ch\dfs\Applications\Altium\Datasheets\BOSSARD_BN5687-3061605.pdf, LatestRevisionDate=15/01/2013, Mounted=Yes, PackageDescription="M3 L=6mm Hexalobular Socket Pan Head Screw, Fully Threaded - Stainless Steel A2", Part Description="M3 L=6mm Hexalobular Socket Pan Head Screw, Fully Threaded, Stainless Steel A2", Part Number=BOSSARD_BN5687-3061605_v, Pin Count=0, PressFit=No, Sense=No, SMD=No, Socket=No, Status=None
TP1: library part SMD_PAD_1.27X1.27MM, Author="CERN DEM JLC", ComponentHeight=0mm, Component Type="Standard (No BOM)", CreateDate=12/01/2008, Family="Test Point", HelpURL=Undefined, LatestRevisionDate=12/01/2008, Mounted=No, PackageDescription="1.27mm x 1.27mm PCB Copper Area (SMD Test Point)", Part Description="1.27mm x 1.27mm PCB Copper Area (SMD Test Point)", Part Number=SMD_PAD_1.27X1.27MM, Pin Count=1, Sense=No, SMD=Yes, Socket=No, Status=None
U1: library part CMP-0188-00733-2, "Low Power 12-Bit A/D Converter With I2C Interface, 5-Pin SOT-23, Industrial Temperature, Tape and Reel", Code_IPC=SOT23-5, ComponentLink1Description="Manufacturer URL", ComponentLink1URL=http://www.microchip.com/, ComponentLink2Description=Datasheet, ComponentLink2URL=http://ww1.microchip.com/downloads/en/DeviceDoc/21732c.pdf, ComponentLink3Description="Package Specification", ComponentLink3URL=http://www.microchip.com/stellent/groups/techpub_sg/documents/packagingspec/en012702.pdf, DatasheetVersion="revC, Jul-2006", Manufacturer Part Number=MCP3221A5T-I/OT, PackageDescription="5-Lead Plastic Small Outline Transistor (OT) [SOT-23]", PackageReference=SOT-23-OT5, PackageVersion="revBB, Aug-2009", RevisionNote="URLs added."
U2: library part CMP-0318-01236-2, "Dual 12-Bit nanoDAC with I2C Interface and 5 ppm/degC On-Chip Reference, -40 to +105 degC, CP-10-9, Pb-Free, Reel", Generic Part Number=AD5627R, Manufacturer="Analog Devices", # DAC Outputs=2, ComponentLink1Description="Manufacturer URL", ComponentLink1URL=http://www.analog.com/en/index.html, ComponentLink2Description=Datasheet, ComponentLink2URL=http://www.analog.com/static/imported-files/data_sheets/AD5627R_5647R_5667R_5627_5667.pdf, ComponentLink3Description="Package Specification", ComponentLink3URL=http://www.analog.com/static/imported-files/packages/CP_10_9.pdf, ComponentLink4Description="Product URL", ComponentLink4URL=http://www.analog.com/en/digital-to-analog-converters/da-converters/ad5627r/products/product.html, DatasheetVersion=Rev.0, Manufacturer Part Number=AD5627RBCPZ-REEL7, Max V+=5.5V, Mounting Technology="Surface Mount", Op Pwr Diss=5.75mW, PackageDescription="10-Lead Lead Frame Chip Scale Package [LFCSP_WD] 3 x 3 mm Body, Very Very Thin, Dual Lead", PackageReference=CP-10-9, PackageVersion=02-27-2012-B, Packing=Reel, Resolution (Bits)=12, RevisionNote="Component URL fixed", RoHS=Y, Settling Time=3Âµs, Single Supply=Yes

## Free pads (board coordinates)
  oval 6.7x5.5 hole 3.2 slot 4 at 0 deg: 0(152.5,3) 5(152.5,26.25)
  oval 6.7x6 hole 3.2 slot 4 at 0 deg: 7(186.5,3) 10(186.5,26.25) 14(26.503,4.609) 14(26.503,24.624) 15(92.644,3.111) 15(92.644,26.123)
  round 5 hole 4: 16(115.377,13.067)

## Via types
v1: diameter 0.5, hole 0.2, Top Layer to Bottom Layer, tented both sides, 251 vias
v2: diameter 0.6, hole 0.2, Top Layer to Bottom Layer, tented both sides, 55 vias
v3: diameter 0.6, hole 0.3, Top Layer to Bottom Layer, tented both sides, 11 vias

## Nets (pads, with @x,y where several pads share a name; then routed paths per layer and width w, separated by ;. In a path a pad name is that pad's centre, name@x,y a point inside that pad or via, vN(x,y) a via of type N, cw(c..) or ccw(c..) an arc to the next point about the centre after c; other vN are vias at no path point)
FR_PWR: IC10.4 J9.6 L5.2 | length 174.4
  Top Layer w0.203: v1(33.551,8.368) 35.123,8.368 35.241,8.25 36.733,8.25 ; v1(34.25,15.5) 35.438,15.5 v1(36.129,16.192) ; v1@34.619,12.115 36.917,12.115 v1(36.93,12.128) ; v1(36.129,22.124) 36.14,22.114 39.994,22.114 41.065,23.185 v1(41.065,24.015) v1(36.93,24.015) ; v1(41.134,25.209) 85.83,25.209 86.57,24.468 86.701,24.468 90.176,20.993 95.318,20.993 99.431,25.106 140.644,25.106 159.359,6.391 160.468,6.391 160.863,6.786 162.778,6.786 cw(c163.21,5.77) 163.642,6.786 163.698,6.786 163.752,6.732 cw(c163.21,5.77) 164.172,6.312 164.501,5.983 164.501,3.995 J9.6@165.75,2.746
  Bottom Layer w0.203: v1(33.551,8.368) 34.004,7.916 IC10.4@34.004,5.952 ; v1(34.25,15.5) 34.25,15.42 34.5,15.17 v1(34.5,12.25) ; v1(36.129,16.192) v1(36.129,22.124) ; L5.2@36.287,24.447 36.287,24.437 36.486,24.238 36.496,24.238 36.662,24.072 36.873,24.072 v1(36.93,24.015) ; 37,11.86 37.044,11.817 v1(37.044,8.368) ; v1(41.065,24.015) 41.065,25.059 41.134,25.128 v1(41.134,25.209)
FR_VREF: C25.1 J9.2 R13.2 U2.2 | length 178.4
  Top Layer w0.152: v2(20.864,7.937) 20.972,8.045 20.972,8.8 21.58,9.409 22.111,9.409 22.167,9.353 28.113,9.353 28.163,9.303 33.997,9.303 v1(34.045,9.351) ; v1@34.004,9.303 34.024,9.283 37.971,9.283 38.006,9.247 39.638,9.247 39.811,9.074 41.693,9.074 41.882,9.263 43.772,9.263 43.894,9.385 53.629,9.385 56.775,6.24 56.775,3.716 58.507,1.984 58.764,1.984 58.985,1.764 60.293,1.764 60.742,1.315 81.617,1.315 85.547,5.245 86.701,5.245 89.982,8.526 95.98,8.526 98.207,6.298 98.207,4.361 99.337,3.23 122.84,3.23 124.026,4.416 136.494,4.416 136.961,3.949 146.873,3.949 149.82,6.895 156.83,6.895 162.52,1.206 169.479,1.206 170.83,2.556 J9.2@170.83,2.746
  Bottom Layer w0.152: 19.898,7.264 20.57,7.937 v2(20.864,7.937) ; C25.1@32.423,5.97 32.423,4.702 R13.2@32.504,4.622 32.524,4.622 32.979,5.077 34.579,5.077 34.954,5.452 34.954,7.433 34.03,8.357 34.03,9.336 v1(34.045,9.351)
  Bottom Layer w0.203: U2.2@19.898,6.096 19.898,7.264
GND: C1.1 C2.1 C3.1 C4.1 C5.1 C6.1 C7.2 C8.1 C9.1 C10.1 C11.1 C12.1 C13.2 C14.1 C15.1 C16.1 C17.1 C18.1 C21.2 C22.1 C23.1 C24.2 C25.2 C26.1 C27.1 C28.1 D1.1 IC1.7 IC2.3 IC3.2 IC4.2 IC5.3 IC5.8 IC5.11 IC6.3 IC7.3 IC8.2 IC10.2 J1.6 J1.11 J1.15 J1.16 J1.17 J6.8 J7.2 J8.8 J9.4 J9.8 pad.0 pad.5 pad.7 pad.10 pad.14 pad.15 U1.2 U2.3 U2.4 U2.11 | length 103.9
  Top Layer w0.203: v2(8,6.5) 8.348,6.848 9,6.848 ; v2(9,6.5) 9,6.848 ; v1(10.097,6.848) 9,6.848 ; v2(17.25,8.25) 17.25,8.398 16.538,9.11 16.179,9.11 15.814,9.475 15.814,10.05 16.343,10.578 v2(16.368,10.578) 16.368,11.543 17.178,12.352 18.319,12.352 18.72,12.753 19.679,12.753 19.904,12.528 v1(20.944,12.528) ; v2(76.541,4.254) 77.336,4.254 78.36,3.23 78.435,3.23 78.675,3.47 v2(79.75,3.47)
  Bottom Layer w0.203: C18.1@1.712,26.238 1.712,27.096 v1(1.763,27.147) ; C1.1@2.119,6.452 3.305,6.452 3.291,6.438 v1(3.236,6.438) ; C2.1@2.164,20.9 v2(2.164,21.914) ; v1(4.25,5.5) v1(5,5.5) 10.5,5.5 10.5,5.25 11.15,4.6 C4.1@12.25,4.6 13.066,3.784 v1(13.066,3.568) 13.066,3.366 12.38,2.68 12.38,1.714 ; J1.11@5.27,10.432 6.392,10.432 6.392,10.147 J1.6@7.25,9.289 7.539,9 7.762,9 7.807,9.045 9.955,9.045 10.983,8.017 v1(10.983,7.124) 10.983,5.983 v2(10.75,5.75) ; v1(11.415,21.018) 11.509,20.924 C10.1@12.323,20.924 ; v2(11.5,20) 11.65,20 C3.1@12.5,19.15 ; v2(13.93,4.152) IC3.2@14.839,4.152 ; 14.514,0.393 14.525,0.404 18.934,0.404 C22.1@19.319,0.79 ; 14.514,0.808 15.786,0.808 C8.1@15.786,1.383 15.786,2.554 v2(16.165,2.933) ; v2(16.368,10.578) 16.296,10.578 16.409,10.691 C5.1@15.55,11.55 16.45,12.45 IC4.2@17.5,12.45 ; C7.2@17.389,7.175 17.389,8.111 v2(17.25,8.25) ; C6.1@17.9,9.45 17.328,8.878 17.328,8.328 v2(17.25,8.25) ; 18.3,24.615 v1(18.3,25.474) ; v2(19.162,7.987) 19.013,7.987 18.75,8.25 v2(17.25,8.25) ; U2.3@20.398,6.096 20.398,6.713 v2(20.59,6.906) 20.898,6.599 U2.4@20.898,6.096 ; v1(20.944,12.528) 20.95,12.534 20.95,15.04 20.75,15.24 IC1.7@20.95,15.44 ; C25.2@32.423,7.57 33.228,7.57 33.475,7.322 v1(33.484,7.322) ; v1(34.808,4.371) 34.808,4.291 34.954,4.145 IC10.2@34.954,3.352 ; v1(37,7.402) 37.85,7.402 38.25,7.802 ; v1(37.05,2.702) 37.13,2.702 37.214,2.619 37.627,2.619 C28.1@38.25,1.995 ; C24.2@40.096,7.846 40.121,7.846 40.495,7.472 40.495,7.331 40.623,7.203 v1(40.623,7.122) ; IC8.2@42.64,3.502 v1(42.64,4.377) ; C15.1@42.806,7.382 C15.1@42.842,7.346 v1(42.842,6.389) ; v1(44.788,4.552) 44.788,5.226 C17.1@44.818,5.256 C17.1@44.805,5.27 ; IC5.11@46.413,3.877 v1(47.513,3.877) ; IC5.3@52.313,5.827 v2(53.5,5.827) 53.576,5.903 53.576,6.125 53.767,6.315 53.767,6.705 53.871,6.809 53.871,7.003 53.99,7.122 54.263,7.122 C16.1@54.331,7.19 ; v1(55.281,3.39) U1.2@55.281,4.59 55.331,4.64 C23.1@55.331,5.638 ; v1(67.25,9.689) 67.25,8.976 C21.2@67.4,8.826 ; v2(140.523,5.473) 140.581,5.415 D1.1@140.581,4.242 ; J9.8@163.21,2.746 163.21,2.09 163.5,1.8 163.5,1.5 163.75,1.25 171.874,1.25 172.574,1.95 173.75,1.95 173.95,1.75 v2(175,1.75)
  Bottom Layer w0.254: IC2.3@12.592,25.971 13.396,25.971 13.657,26.232 13.657,26.74 13.835,26.918 C11.1@13.835,27.647 ; v1(15.885,25.971) 15.945,25.911 16.175,25.911 ; IC7.3@80.742,3.153 80.742,2.008 v1(80.75,2) ; v1(83.729,2.425) 83.881,2.577 C12.1@83.881,3.39 ; C13.2@118.246,4.767 C13.2@118.246,4.87
  Bottom Layer w0.762: C14.1@141.278,7.962 141.278,9.286 v1(141.478,9.486) v1@141.402,9.562
  other v1: 105,-0.377 106.763,-0.377 108.25,-0.377 24.5,-0.25 25.75,-0.25 27.25,-0.25 28.25,-0.25 11.25,1 139.25,1.25 82.85,1.566 87.75,1.75 97.5,1.75 57.286,1.796 32.817,1.829 24,2 29.25,2 126.25,2 106.5,2.25 117,2.25 4,2.75 142.494,3.285 138.074,3.315 54.171,3.429 0.645,3.568 1.91,3.649 4.43,3.72 126.214,3.768 102.286,3.844 120.983,3.855 106.728,3.873 115.875,3.971 98.978,4.473 87.217,4.534 19.848,4.571 20.948,4.571 142.458,4.631 146.5,4.637 4.75,4.75 5.5,5 84.633,5.331 86.478,5.848 97.335,5.848 155.88,6.208 4.25,6.25 10.75,6.5 126.214,6.739 98.565,6.964 149.214,7.315 35.738,7.395 90.141,7.429 58.25,7.5 69,7.5 155.88,7.516 159.395,7.581 169.512,7.621 44.602,7.652 94.971,7.679 41.686,7.874 22.5,8.25 31.252,8.394 97.079,8.667 61.75,8.75 123,9 153.5,9 169.388,9.039 74.78,9.08 89.586,9.076 94.935,9.145 72.25,9.25 11.053,9.328 158.536,9.432 65.5,10.75 162.5,11.5 32.243,11.95 23.263,12 60,12 69,12.5 119.25,12.5 154.924,12.539 46.342,13.123 36.306,13.161 42.756,13.161 134.25,13.5 85.405,13.702 91.286,13.945 94.643,13.945 148.5,14 111.999,14.261 100.086,14.312 82.25,15.25 63.75,15.5 77.25,15.5 37,15.75 43.5,15.75 51.25,15.75 57.25,15.75 71,15.75 102.75,15.75 108.5,15.75 150.171,17.539 143.5,19 179.5,19.25 95.354,19.289 90.442,19.329 93.286,19.329 161.25,20.5 88.919,20.676 97.407,20.676 146.536,21.147 30.49,21.272 10.25,21.75 41.734,21.771 34.095,21.933 11.25,22.5 130.5,23.25 39.75,23.5 47.5,23.5 85.278,23.507 105.75,23.5 113.5,23.5 121,23.5 33.25,23.75 44,23.75 72.25,23.75 139.25,23.75 100.112,23.761 54.5,24 62.5,24 79,24 4.75,25 9.75,25 142.786,25.145 30.313,25.209 179.75,27.25 147.25,27.5 32.25,27.75 38.25,27.75 45.5,27.75 53.5,27.75 59,27.75 64.25,27.75 71,27.75 79,27.75 131.25,27.75 3.75,28 88.25,28 97.5,28 105.25,28 113.25,28 121.75,28 140.25,28 158.25,28.25
  other v2: 129.75,1.668 71.833,2.25 50.786,2.551 159.359,2.933 56.231,3.395 147.5,3.39 161.248,4.069 36.75,4.152 74.5,4.242 69.438,4.304 67.75,4.455 79.75,4.709 150.012,6.021 68.383,6.111 66,6.839 74.102,6.906 173.25,7.426 55.774,8.695 172,8.719 58.25,10.5
  other v3: 0.645,11.864 0.645,15.802 10.91,19.178 8.445,20.787 4.516,22.338 7.856,22.44 0.808,22.48 21.524,24.497 17.83,24.624 21.371,25.971 19.328,27.971
INPWR: J6.6 R3.2 | length 7.5
  Bottom Layer w0.254: R3.2@56.337,6.933 56.5,6.77 R3.2@56.5,6.75 56.663,6.587 56.663,6.539 57.25,5.952 57.25,5.059 57.929,4.381 60.209,4.381 J6.6@61.61,2.98
NetC10_2: C10.2 J1.5 L5.1 | length 33.6
  Top Layer w0.203: J1.5@9.23,19.576 9.23,21.627 10.9,23.297 v1(11.948,23.297) 12.376,23.297 13.082,22.591 15.626,22.591 16.652,21.564 16.652,21.525 16.981,21.196 17.479,21.196 17.83,21.547 18.939,21.547 19.246,21.24 23.63,21.24 24.208,20.662 28.511,20.662 32.854,25.005 v1(34.656,25.005)
  Bottom Layer w0.203: v1(11.948,23.297) 12.057,23.297 12.323,23.031 C10.2@12.323,22.424 C10.2@12.482,22.265 ; v1(34.656,25.005) 34.808,25.005 L5.1@35.367,24.447
NetC18_2: C18.2 J1.10 L6.1 | length 10
  Top Layer w0.2: v1@2.862,22.383 2.982,22.262 2.982,21.83 4.026,20.787 4.026,19.394 4.764,18.655 7.028,18.655 J1.10@7.25,18.433
  Bottom Layer w0.2: L6.1@1.735,23.38 1.735,22.925 1.992,22.669 v1@2.754,22.669
  Bottom Layer w0.203: C18.2@1.712,24.738 1.712,23.402 L6.1@1.735,23.38
  other v1: 2.804,22.44
NetC19_1: C19.1 IC8.3 R4.1 | length 3.4
  Bottom Layer w0.2: R4.1@40.19,3.852 R4.1@40.21,3.852
  Bottom Layer w0.203: R4.1@40.21,3.852 40.23,3.852 40.58,3.502 IC8.3@41.69,3.502 41.69,3.252 41.91,3.032 C19.1@41.91,2.058 C19.1@42.084,2.232
NetC19_2: C19.2 R9.1 | length 1.1
  Bottom Layer w0.203: C19.2@42.81,2.058 43.803,2.058 R9.1@43.848,2.103
NetC20_1: C20.1 IC10.3 R13.1 | length 3.4
  Bottom Layer w0.203: R13.1@32.504,3.682 33.805,3.682 34.004,3.484 IC10.3@34.004,3.352 34.004,3.102 33.805,2.904 33.745,2.904 33.626,2.785 C20.1@33.626,1.902
NetC20_2: C20.2 R16.1 | length 0.9
  Bottom Layer w0.254: C20.2@34.526,1.902 R16.1@35.434,1.902
NetC21_1: C21.1 J7.7 R2.1 | length 4.7
  Bottom Layer w0.254: C21.1@69,8.826 70.233,8.826 R2.1@70.559,8.5 70.559,5.579 J7.7@70.5,5.52
NetC22_2: C22.2 U2.10 | length 1.4
  Bottom Layer w0.254: C22.2@19.319,1.69 19.398,1.769 U2.10@19.398,3.046
NetC23_2: C23.2 R3.1 U1.3 | length 2.4
  Bottom Layer w0.152: R3.1@55.56,6.75 55.56,6.73 55.774,6.516 55.794,6.516 56.231,6.079 C23.2@56.231,5.638 U1.3@56.231,4.59
NetIC1_8: IC1.8 IC1.12 | length 8.5
  Bottom Layer w0.152: IC1.8@15.55,15.44 15.002,15.44 14.546,15.895 14.546,17.105 14.893,17.451 16.42,17.451 16.554,17.585 16.554,20.52 IC1.12@15.55,20.52
NetIC1_9: IC1.9 IC2.4 | length 17.7
  Bottom Layer w0.152: IC2.4@14.692,25.971 14.902,25.971 15.026,26.094 15.026,26.305 15.55,26.829 15.55,26.834 15.812,27.096 17.904,27.096 19.119,25.881 19.119,23.935 17.735,22.551 17.735,21.535 17.691,21.491 17.691,17.75 17.735,17.706 17.735,16.836 17.425,16.527 16.579,16.527 ; IC1.9@15.55,16.71 15.733,16.527 16.579,16.527 ; 16.659,16.447 16.579,16.527
NetIC1_11: IC1.11 IC6.2 | length 12
  Bottom Layer w0.152: IC1.11@15.55,19.25 14.54,19.25 14.485,19.305 14.485,20.825 14.143,21.167 13.993,21.167 13.745,21.415 13.745,23.056 14.013,23.324 14.013,24.965 14.361,25.313 15.152,25.313 15.407,25.568 15.407,26.178 15.969,26.74 16.864,26.74 17.041,26.563 IC6.2@17.041,26.013
NetIC5_4: IC5.4 IC8.1 R9.2 | length 17.1
  Top Layer w0.203: v1(44.754,2.871) 44.697,2.814 44.697,2.533 44.653,2.489 45.472,1.671 v1(46.113,1.671)
  Bottom Layer w0.203: IC8.1@43.59,3.502 43.59,3.252 43.789,3.054 44.491,3.054 44.765,2.78 44.788,2.78 R9.2@44.788,2.103 ; v1(44.754,2.871) 44.771,2.854 R9.2@44.771,2.14 ; v1(46.113,1.671) 46.382,1.402 53.113,1.402 53.313,1.601 53.313,4.958 53.194,5.077 52.413,5.077 IC5.4@52.313,5.177
NetIC5_5: IC5.5 R6.1 | length 6.9
  Bottom Layer w0.203: R6.1@50.263,8.45 50.263,8.4 49.327,7.464 49.327,5.153 49.953,4.527 IC5.5@52.313,4.527
NetIC5_9: IC5.9 R7.1 | length 8
  Bottom Layer w0.203: IC5.9@46.413,2.577 47.638,2.577 48.971,3.91 48.971,5.788 48.757,6.003 48.757,8.242 R7.1@48.413,8.586